# Altium PCB MC_SunSensorPCB.PcbDoc (part 1 of 2)
Units mm, origin at the board's own origin, x right, y up, seen from the top; angles counter-clockwise.
Board outline 90.17 x 95.88 mm, 4 copper layers (F.Cu, In1.Cu, In2.Cu, B.Cu); 111 components, 182 nets, 555 pads, 174 vias.
Unrouted connection lines stored in the file: 3.
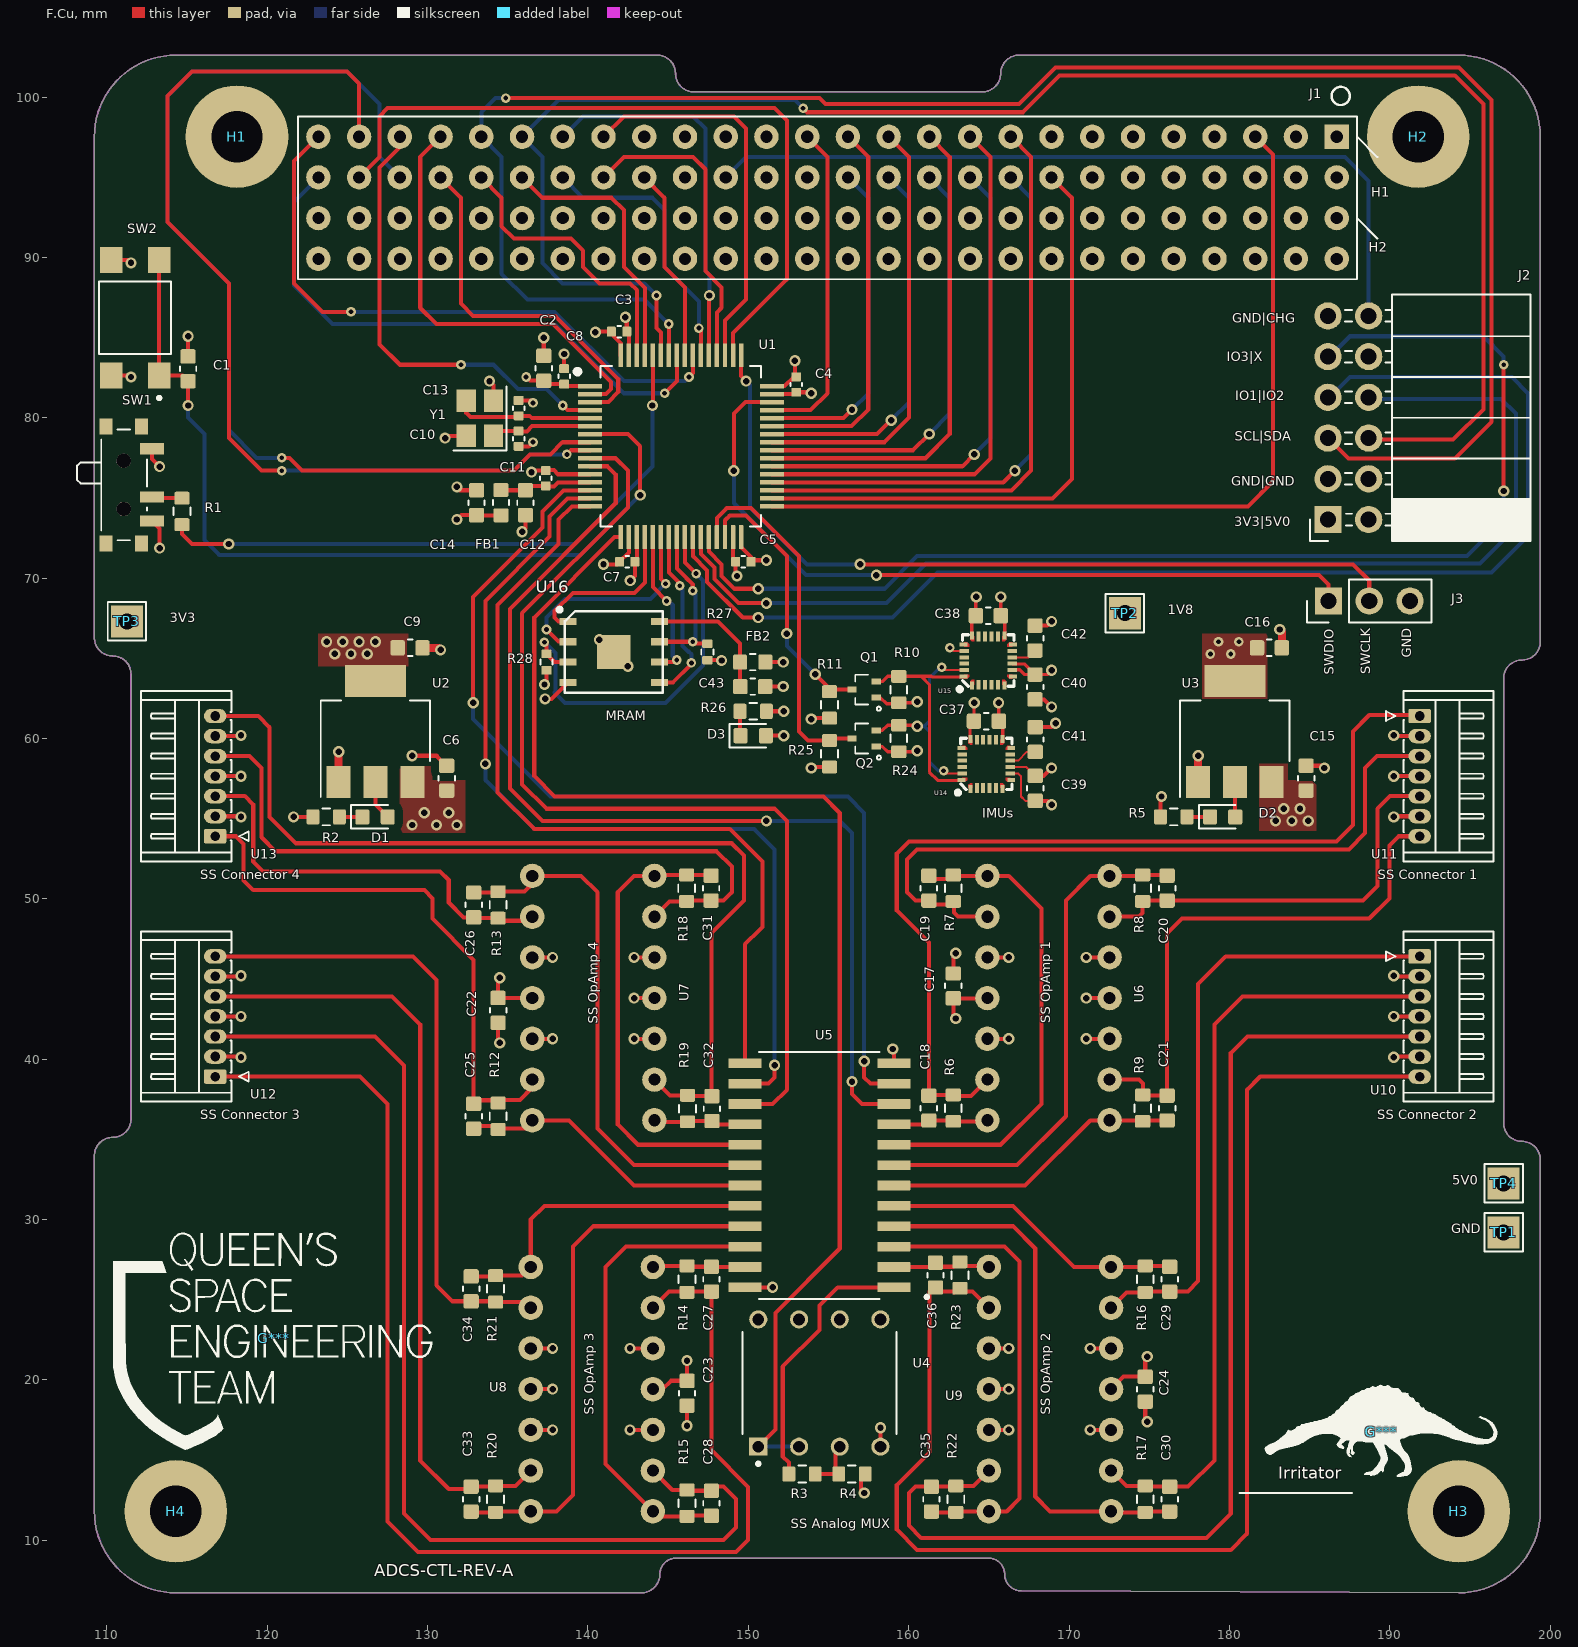
[diagram p0: F.Cu view]
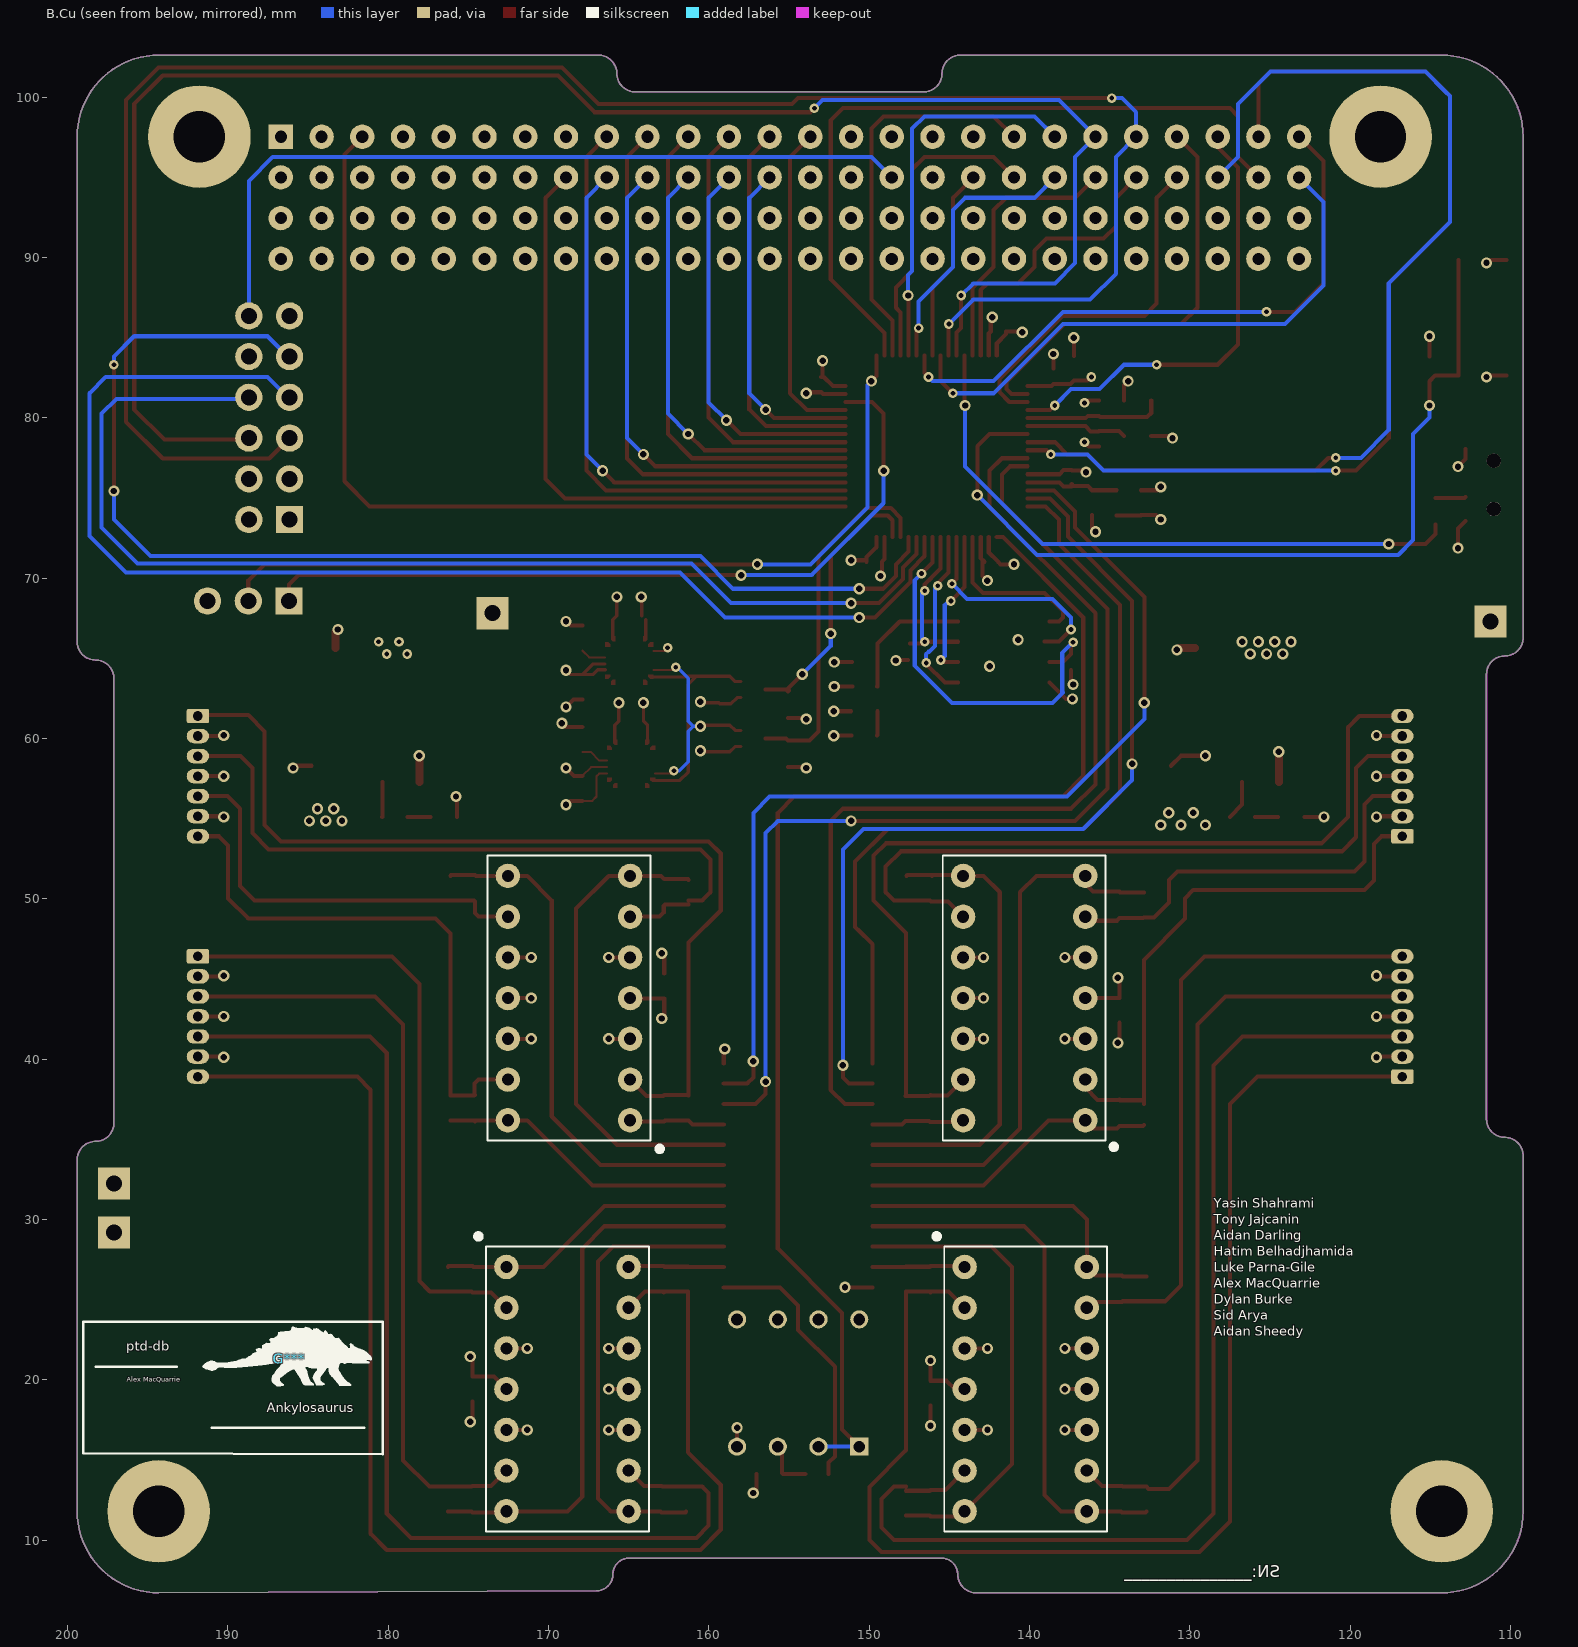
[diagram p1: B.Cu view, seen from below]
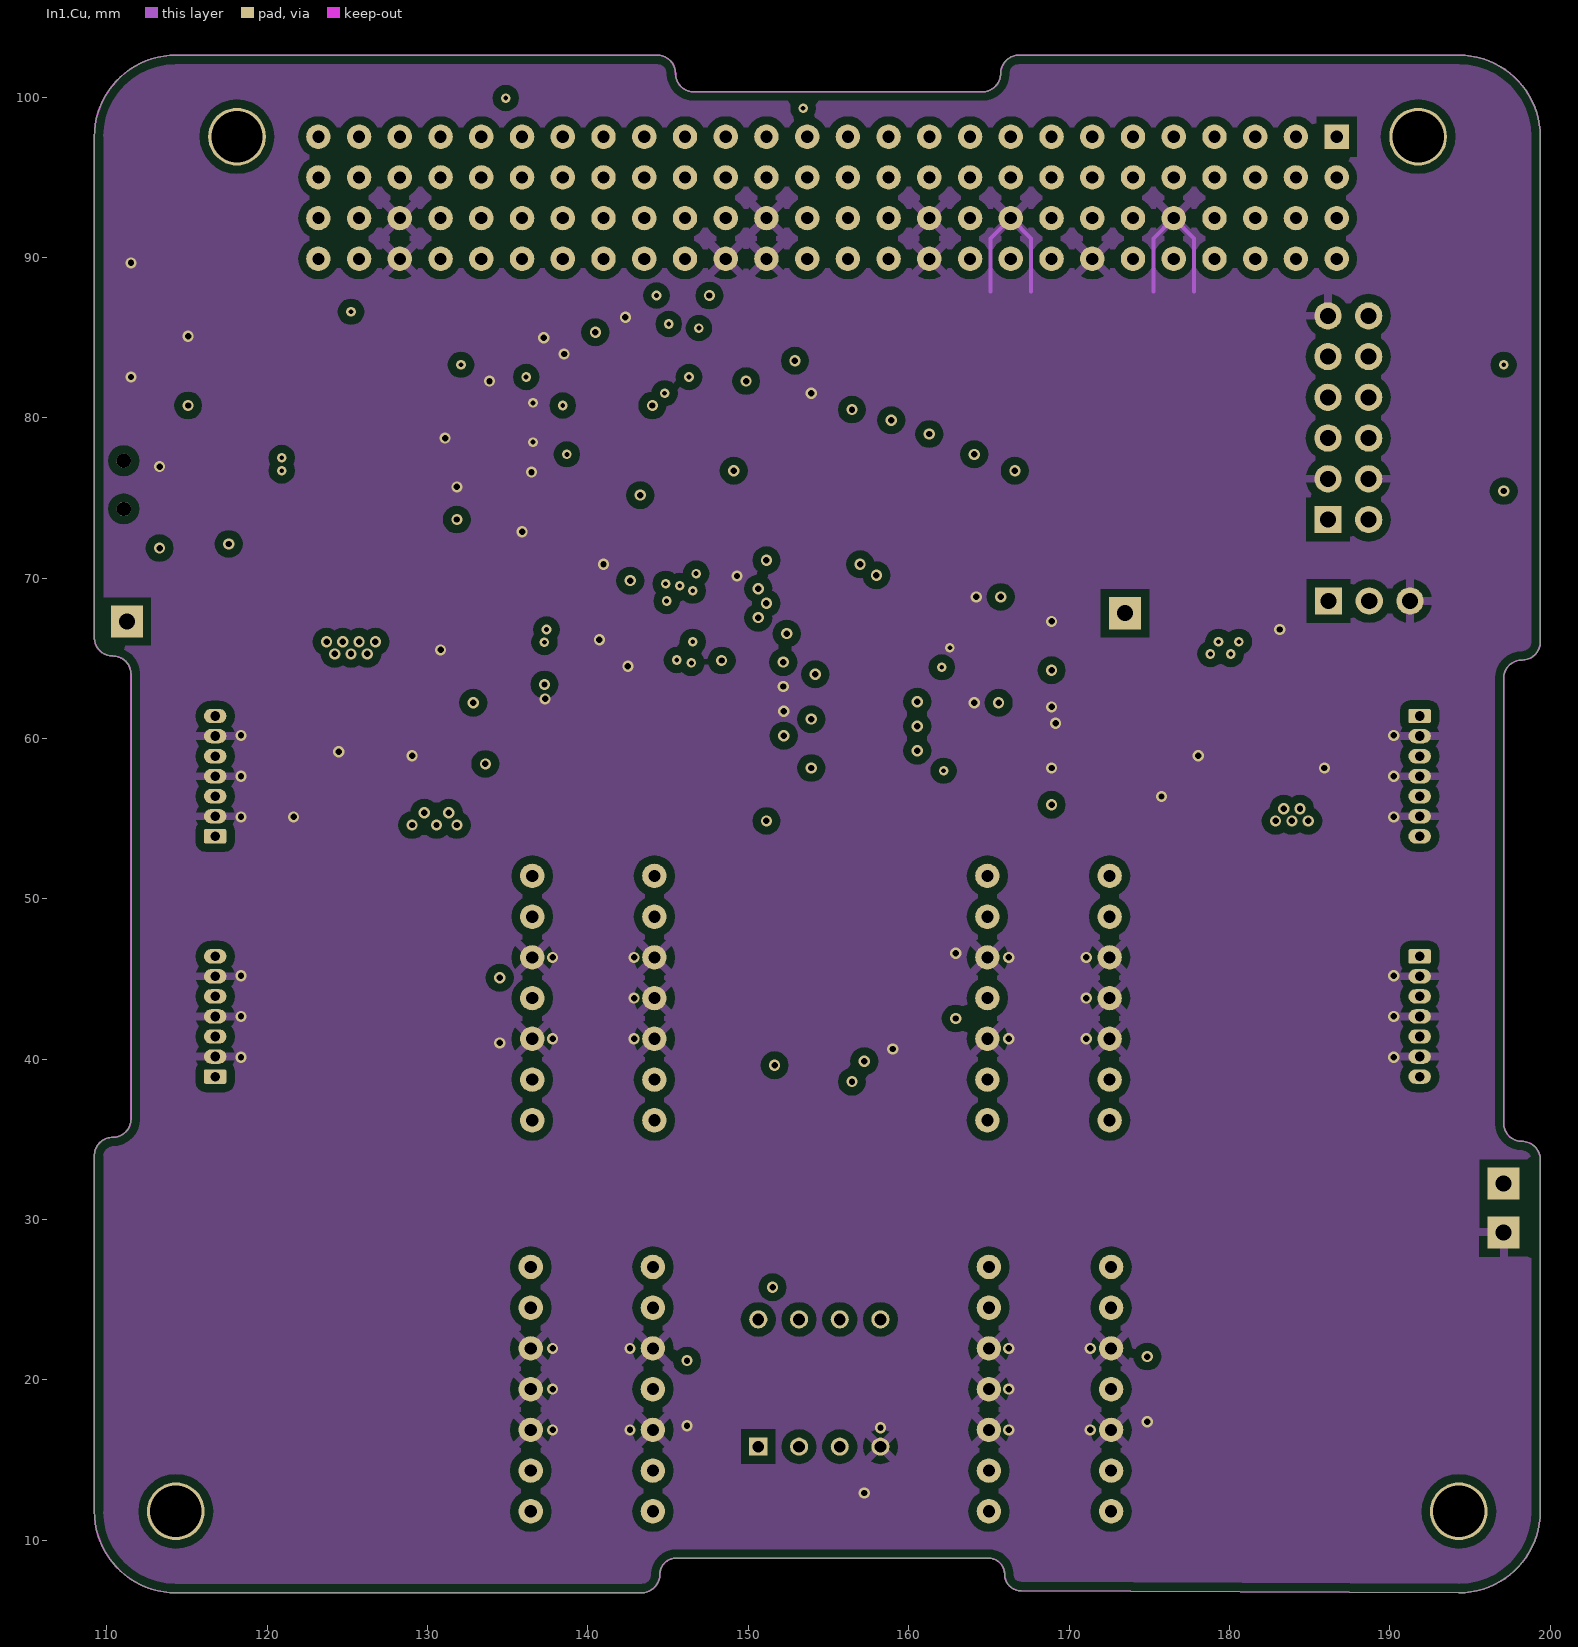
[diagram p2: In1.Cu]
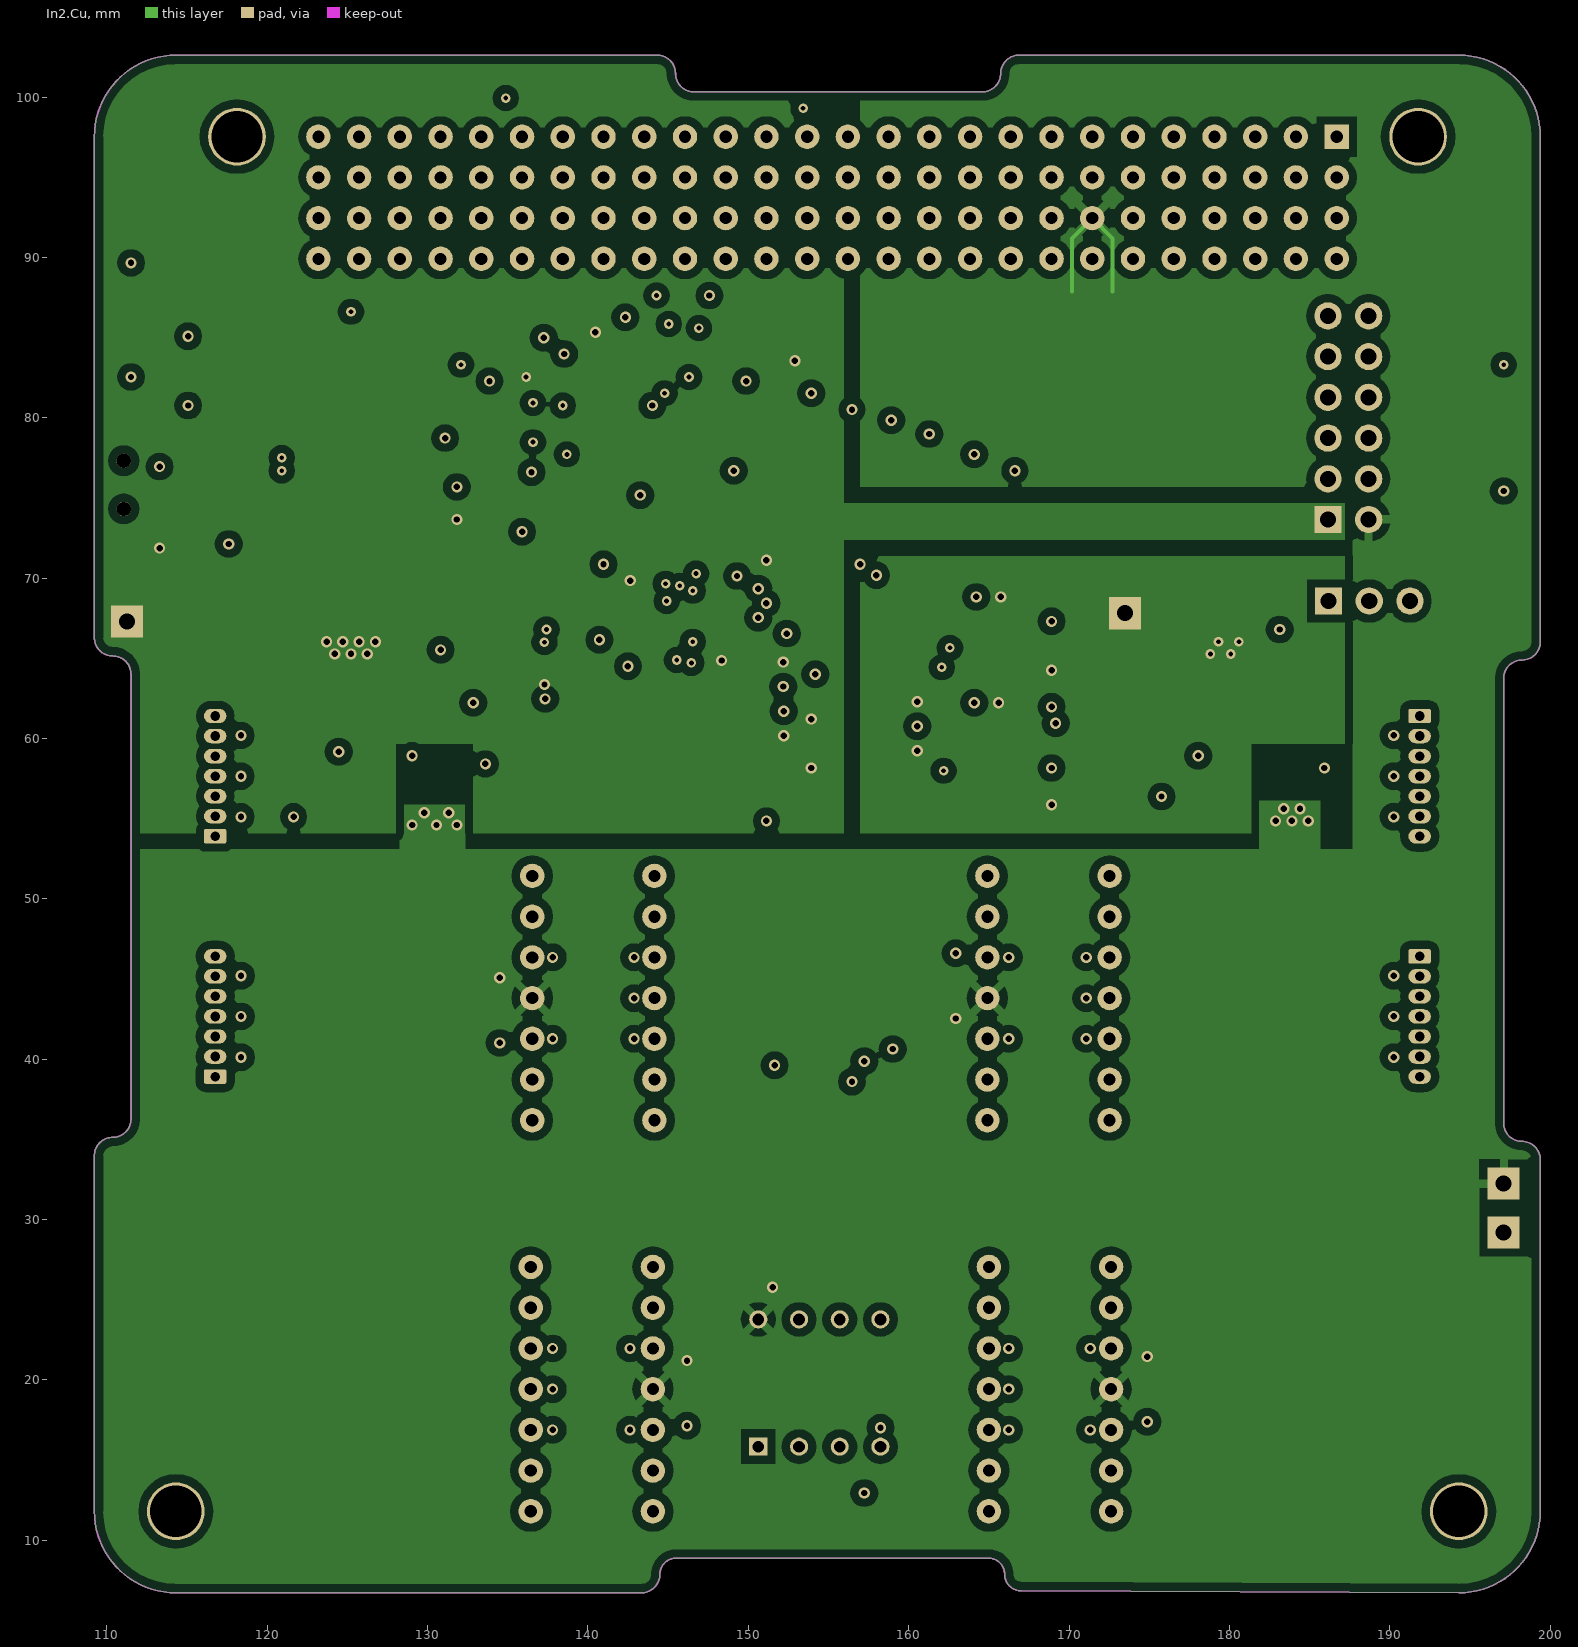
[diagram p3: In2.Cu]

## Layer stack, top to bottom
F.Mask: solder mask 0.0102, Solder Resist, Dk 3.5
F.Cu: signal copper 0.0356
Dielectric 1: dielectric 0.32, FR-4, Dk 4.8
In1.Cu: signal copper 0.0356
Dielectric2: dielectric 0.32, FR-4, Dk 4.8
In2.Cu: signal copper 0.0356
Dielectric3: dielectric 0.32, FR-4, Dk 4.8
B.Cu: signal copper 0.0356
B.Mask: solder mask 0.0102, Solder Resist, Dk 3.5

## Board outline
109.22,66.287 ccw(c110.363,66.287) 110.363,65.144 cw(c110.363,64.001) 111.506,36.269 cw(c110.363,36.269) 110.363,35.126 ccw(c110.363,33.983) 109.22,11.804 ccw(c114.3,11.804) 114.3,6.724 143.337,6.724 ccw(c143.337,7.867) 144.48,7.867 cw(c145.498,7.864) 145.498,8.883 164.973,8.883 cw(c164.973,7.867) 165.989,7.867 ccw(c167.005,7.867) 167.005,6.851 194.31,6.724 ccw(c194.31,11.804) 199.39,11.804 199.39,33.729 ccw(c198.247,33.729) 198.247,34.872 cw(c198.247,36.015) 197.104,36.015 197.104,63.747 cw(c198.247,63.747) 198.247,64.89 ccw(c198.247,66.033) 199.39,66.033 199.39,97.529 ccw(c194.31,97.529) 194.31,102.609 166.878,102.609 ccw(c166.878,101.466) 165.735,101.466 cw(c164.592,101.466) 164.592,100.323 146.604,100.323 cw(c146.604,101.466) 145.461,101.466 ccw(c144.318,101.466) 144.318,102.609 114.3,102.609 ccw(c114.3,97.529) 109.22,66.287

## Design rules (kind name [scope] priority, off if disabled: settings)
Clearance "Clearence 0.508_Polygon" [InNamedPolygon('F.Cu-1.8V') OR InNamedPolygon('F.Cu-+5V') OR InNamedPolygon('F.Cu-+3V3') OR InNamedPolygon('F.Cu-+5V-1') OR InNamedPolygon('In1.Cu-GND') OR InNamedPolygon('In2.Cu-+5V') OR InNamedPolygon('In2.Cu-1.8V') OR InNamedPolygon('In2.Cu-+3V3')] p1: gap=0.508 ignorepadtopadclearanceinfootprint=FALSE
MinimumSolderMaskSliver [All] p1: minsoldermaskwidth=0
PolygonConnect Polygon_In2.Cu-+3V3_ConnectDirect [IsNamedPolygon('In2.Cu-+3V3')] p1: connectstyle=Direct reliefconductorwidth=0.254 reliefentries=4 polygonreliefangle="90 Angle" airgapwidth=0.254
PolygonConnect Polygon_In2.Cu-1.8V_ConnectDirect [IsNamedPolygon('In2.Cu-1.8V')] p2: connectstyle=Direct reliefconductorwidth=0.254 reliefentries=4 polygonreliefangle="90 Angle" airgapwidth=0.254
PolygonConnect Polygon_In2.Cu-+5V_ConnectDirect [IsNamedPolygon('In2.Cu-+5V') vs IsVia] p3: connectstyle=Direct reliefconductorwidth=0.254 reliefentries=4 polygonreliefangle="90 Angle" airgapwidth=0.254
PolygonConnect Polygon_In2.Cu-+5V_ConnectRelief45 [IsNamedPolygon('In2.Cu-+5V') vs (IsThruPin or IsSMTPin) and (PadShape_AllLayers = 'Round')] p4: connectstyle=Relief reliefconductorwidth=0.508 reliefentries=4 polygonreliefangle="45 Angle" airgapwidth=0.508
PolygonConnect Polygon_In2.Cu-+5V_ConnectRelief90 [IsNamedPolygon('In2.Cu-+5V') vs (IsThruPin or IsSMTPin) and (PadShape_AllLayers <> 'Round')] p5: connectstyle=Relief reliefconductorwidth=0.508 reliefentries=4 polygonreliefangle="90 Angle" airgapwidth=0.508
PolygonConnect Polygon_In1.Cu-GND_ConnectDirect [IsNamedPolygon('In1.Cu-GND') vs IsVia] p6: connectstyle=Direct reliefconductorwidth=0.254 reliefentries=4 polygonreliefangle="90 Angle" airgapwidth=0.254
PolygonConnect Polygon_In1.Cu-GND_ConnectRelief45 [IsNamedPolygon('In1.Cu-GND') vs (IsThruPin or IsSMTPin) and (PadShape_AllLayers = 'Round')] p7: connectstyle=Relief reliefconductorwidth=0.508 reliefentries=4 polygonreliefangle="45 Angle" airgapwidth=0.508
PolygonConnect Polygon_In1.Cu-GND_ConnectRelief90 [IsNamedPolygon('In1.Cu-GND') vs (IsThruPin or IsSMTPin) and (PadShape_AllLayers <> 'Round')] p8: connectstyle=Relief reliefconductorwidth=0.508 reliefentries=4 polygonreliefangle="90 Angle" airgapwidth=0.508
PolygonConnect Polygon_F.Cu-+5V-1_ConnectDirect [IsNamedPolygon('F.Cu-+5V-1')] p9: connectstyle=Direct reliefconductorwidth=0.254 reliefentries=4 polygonreliefangle="90 Angle" airgapwidth=0.254
PolygonConnect Polygon_F.Cu-+3V3_ConnectDirect [IsNamedPolygon('F.Cu-+3V3')] p10: connectstyle=Direct reliefconductorwidth=0.254 reliefentries=4 polygonreliefangle="90 Angle" airgapwidth=0.254
PolygonConnect Polygon_F.Cu-+5V_ConnectDirect [IsNamedPolygon('F.Cu-+5V')] p11: connectstyle=Direct reliefconductorwidth=0.254 reliefentries=4 polygonreliefangle="90 Angle" airgapwidth=0.254
PolygonConnect Polygon_F.Cu-1.8V_ConnectDirect [IsNamedPolygon('F.Cu-1.8V')] p12: connectstyle=Direct reliefconductorwidth=0.254 reliefentries=4 polygonreliefangle="90 Angle" airgapwidth=0.254
RoutingVias [All] p1: holewidth=0.711 width=1.27 viastyle="Through Hole" minholewidth=0.711 minwidth=1.27 maxholewidth=0.711 maxwidth=1.27
SilkToSilkClearance [All] p1: silktosilkclearance=0
SilkToSolderMaskClearance [IsPad] p1: minsilkscreentomaskgap=0 clearancetoexposedcopper=TRUE
SolderMaskExpansion [All] p1: expansion=0.102 istentingtop=FALSE
Width [All] p1: maxlimit=10 minlimit=0.254 preferedwidth=0.254 minimp=50.000000 maximp=50.000000 favimp=50.000000
27 further rules are at their usual default settings.

## Components (designator, comment, footprint, x,y, rotation, side; value= is the part's Value field where it differs from the comment)
C1 "100nF" C_0603_1608Metric 115.062,83.051 r90 top
C2 "10uF" C_0603_1608Metric 137.242,83.087 r90 top
C3 "100nF" C_0402_1005Metric 141.941,85.373 r0 top
C4 "100nF" C_0402_1005Metric 152.99,82.071 r270 top
C5 "100nF" C_0402_1005Metric 149.688,71.022 r180 top
C6 "10uF" C_0603_1608Metric 131.191,57.524 r90 top
C7 "100nF" C_0402_1005Metric 142.449,71.022 r180 top
C8 "100nF" C_0402_1005Metric 138.512,82.579 r90 top
C9 "10uF" C_0603_1608Metric 128.905,65.652 r180 top
C10 "4pF" C_0402_1005Metric 135.675,78.696 r270 top
C11 "10nF" C_0402_1005Metric 137.369,76.229 r90 top
C12 "1uF" C_0603_1608Metric 136.099,74.705 r270 top
C13 "4pF" C_0402_1005Metric 135.675,80.601 r90 top
C14 "1uF" C_0603_1608Metric 133.051,74.705 r90 top
C15 "1.0uF" C_0603_1608Metric 184.785,57.524 r90 top
C16 "10uF" C_0603_1608Metric 182.499,65.652 r0 top
C17 "100nF" C_0603_1608Metric 162.783,44.57 r90 top
C18 "180pF" C_0603_1608Metric 161.259,36.95 r90 top
C19 "180pF" C_0603_1608Metric 161.259,50.666 r270 top
C20 "180pF" C_0603_1608Metric 176.118,50.666 r270 top
C21 "180pF" C_0603_1608Metric 176.118,36.95 r270 top
C22 "100nF" C_0603_1608Metric 134.398,43.046 r270 top
C23 "100nF" C_0603_1608Metric 146.177,19.17 r270 top
C24 "100nF" C_0603_1608Metric 174.752,19.424 r270 top
C25 "180pF" C_0603_1608Metric 132.874,36.442 r90 top
C26 "180pF" C_0603_1608Metric 132.874,49.619 r270 top
C27 "180pF" C_0603_1608Metric 147.701,26.282 r270 top
C28 "180pF" C_0603_1608Metric 147.701,12.312 r90 top
C29 "180pF" C_0603_1608Metric 176.276,26.282 r270 top
C30 "180pF" C_0603_1608Metric 176.276,12.566 r90 top
C31 "180pF" C_0603_1608Metric 147.676,50.666 r270 top
C32 "180pF" C_0603_1608Metric 147.733,36.919 r270 top
C33 "180pF" C_0603_1608Metric 132.715,12.566 r90 top
C34 "180pF" C_0603_1608Metric 132.715,25.678 r90 top
C35 "180pF" C_0603_1608Metric 161.417,12.566 r90 top
C36 "180pF" C_0603_1608Metric 161.671,26.536 r90 top
C37 "1.0uF" C_0603_1608Metric 164.846,61.08 r180 top
C38 "1.0uF" C_0603_1608Metric 164.964,67.656 r180 top
C39 "0.1uF" C_0603_1608Metric 167.894,56.889 r90 top
C40 "0.1uF" C_0603_1608Metric 167.885,63.211 r270 top
C41 "0.1uF" C_0603_1608Metric 167.894,59.937 r90 top
C42 "0.1uF" C_0603_1608Metric 167.885,66.259 r90 top
C43 "100nF" C_0603_1608Metric 150.273,63.239 r0 top
D1 "GREEN" LED_0603_1608Metric 126.721,55.111 r0 top
D2 "GREEN" LED_0603_1608Metric 179.578,55.111 r0 top
D3 "GREEN" LED_0603_1608Metric 150.304,60.172 r0 top
FB1 "FerriteBead" L_0603_1608Metric 134.575,74.705 r270 top
FB2 "100R @ 100 MHz" L_0603_1608Metric 150.273,64.763 r180 top
G*** "LOGO" LOGO 186.182,21.329 r0 bottom
G*** "LOGO" LOGO 189.484,16.757 r0 top
G*** "LOGO" LOGO 120.396,22.599 r0 top
H1 "MountingHole_Pad" MountingHole_3.2mm_M3_Pad_TopBottom 118.11,97.529 r0 top
H2 "MountingHole_Pad" MountingHole_3.2mm_M3_Pad_TopBottom 191.77,97.529 r0 top
H3 "MountingHole_Pad" MountingHole_3.2mm_M3_Pad_TopBottom 194.31,11.804 r0 top
H4 "MountingHole_Pad" MountingHole_3.2mm_M3_Pad_TopBottom 114.3,11.804 r0 top
J1 "PC104_Connector" pc104-connector 156.21,94.989 r270 top
J2 "Conn_02x06_Odd_Even" PinSocket_2x06_P2.54mm_Horizontal 186.145,73.653 r180 top
J3 "Conn_01x03_Female" PinHeader_1x03_P2.54mm_Vertical 186.182,68.573 r90 top
Q1 "RE1C002UNTCL" RE1C002UNTCL 157.226,63.049 r90 top
Q2 "RE1C002UNTCL" RE1C002UNTCL 157.226,60.001 r90 top
R1 "10k" R_0603_1608Metric 114.681,74.161 r270 top
R2 "2k2" R_0603_1608Metric 123.673,55.111 r0 top
R3 "1Meg" R_0603_1608Metric 153.353,14.132 r0 top
R4 "2Meg" R_0603_1608Metric 156.464,14.132 r0 top
R5 "1k" R_0603_1608Metric 176.53,55.111 r0 top
R6 "5.76k" R_0603_1608Metric 162.783,36.95 r90 top
R7 "5.76k" R_0603_1608Metric 162.783,50.666 r90 top
R8 "5.76k" R_0603_1608Metric 174.594,50.666 r270 top
R9 "5.76k" R_0603_1608Metric 174.594,36.95 r270 top
R10 "2.2k" R_0603_1608Metric 159.385,63.049 r270 top
R11 "2.2k" R_0603_1608Metric 155.067,62.096 r270 top
R12 "5.76k" R_0603_1608Metric 134.398,36.442 r90 top
R13 "5.76k" R_0603_1608Metric 134.398,49.619 r90 top
R14 "5.76k" R_0603_1608Metric 146.177,26.282 r270 top
R15 "5.76k" R_0603_1608Metric 146.177,12.312 r270 top
R16 "5.76k" R_0603_1608Metric 174.752,26.282 r270 top
R17 "5.76k" R_0603_1608Metric 174.752,12.566 r270 top
R18 "5.76k" R_0603_1608Metric 146.152,50.666 r270 top
R19 "5.76k" R_0603_1608Metric 146.209,36.919 r270 top
R20 "5.76k" R_0603_1608Metric 134.239,12.566 r90 top
R21 "5.76k" R_0603_1608Metric 134.239,25.678 r90 top
R22 "5.76k" R_0603_1608Metric 162.941,12.566 r90 top
R23 "5.76k" R_0603_1608Metric 163.195,26.536 r90 top
R24 "2.2k" R_0603_1608Metric 159.385,60.001 r270 top
R25 "2.2k" R_0603_1608Metric 155.067,59.048 r270 top
R26 "2k2" R_0603_1608Metric 150.304,61.696 r0 top
R27 "10k" R_0402_1005Metric 147.447,65.398 r90 top
R28 "10k" R_0402_1005Metric 137.414,64.763 r270 top
SW1 "SW_SPDT" SW_SPDT_PCM12 111.379,75.812 r270 top
SW2 "TL3305CF260QG" SW_TL3305CF260QG 111.76,86.234 r90 top
TP1 "GND" TestPoint_THTPad_2.0x2.0mm_Drill1.0mm 197.104,29.203 r0 top
TP2 "1V8" TestPoint_THTPad_2.0x2.0mm_Drill1.0mm 173.482,67.811 r0 top
TP3 "3V3" TestPoint_THTPad_2.0x2.0mm_Drill1.0mm 111.252,67.303 r0 top
TP4 "5V0" TestPoint_THTPad_2.0x2.0mm_Drill1.0mm 197.104,32.251 r0 top
U1 "STM32F103RET6" QFP50P1200X1200X160-64N 145.796,78.225 r0 top
U2 "AMS1117-3.3" SOT-223-3_TabPin2 126.746,60.445 r90 top
U3 "AMS1117-1.8" SOT-223-3_TabPin2 180.34,60.445 r90 top
U4 "LM358N" DIP794W45P254L959H508Q8 154.432,19.805 r90 top
U5 "CD74HC4067M96" SOIC127P1030X265-24N 154.432,32.759 r180 top
U6 "LM324N" Op-Amp 162.37,45.078 r90 top
U7 "LM324N" Op-Amp 133.985,45.078 r90 top
U8 "LM324N" Op-Amp 146.59,18.154 r270 top
U9 "LM324N" Op-Amp 175.165,18.154 r270 top
U10 "DF13-7P-1.25DS(20)" Hirose_DF13-07P-1.25DS_1x07_P1.25mm_Horizontal 191.862,46.415 r270 top
U11 "DF13-7P-1.25DS(20)" Hirose_DF13-07P-1.25DS_1x07_P1.25mm_Horizontal 191.862,61.401 r270 top
U12 "DF13-7P-1.25DS(20)" Hirose_DF13-07P-1.25DS_1x07_P1.25mm_Horizontal 116.748,38.915 r90 top
U13 "DF13-7P-1.25DS(20)" Hirose_DF13-07P-1.25DS_1x07_P1.25mm_Horizontal 116.748,53.901 r90 top
U14 "9DoF IMU" QFN24-3X3 164.846,58.413 r90 top
U15 "9DoF IMU" QFN24-3X3 164.964,64.862 r90 top
U16 "MR25H10MDF" SON127P600X500X90-9N-D 141.605,65.398 r0 top
Y1 "Crystal_GND24" Crystal_SMD_3225-4Pin_3.2x2.5mm 133.262,79.966 r90 top

## Footprints (in the part's own frame and the unit in brackets; to place one, negate y for a bottom-side part, rotate by r counter-clockwise, add the part's x,y. Pads: shape width x height; smd on the part's side, far side on the other; paste and mask are expansions set on the pad)
C_0402_1005Metric [mm]
  rrect25% 0.56x0.62 smd mask+0: 1(-0.48,0) 2(0.48,0)
  silkscreen extent -0.11,-0.36 0.11,0.36
C_0603_1608Metric [mm]
  rrect25% 0.9x0.95 smd mask+0: 1(-0.775,0) 2(0.775,0)
  silkscreen extent -0.14,-0.51 0.14,0.51
Crystal_SMD_3225-4Pin_3.2x2.5mm [mm]
  rect 1.4x1.2 smd mask+0: 1(-1.1,-0.85) 2(1.1,-0.85) 3(1.1,0.85) 4(-1.1,0.85)
  silkscreen extent -2,-1.65 2,1.65
DIP794W45P254L959H508Q8 [mm]
  rect 1.13x1.13 hole 0.74 paste-2539.97 mask+0: 1(-3.97,3.81)
  round 1.13 hole 0.74 paste-2539.97 mask+0: 2(-3.97,1.27) 3(-3.97,-1.27) 4(-3.97,-3.81) 5(3.97,-3.81) 6(3.97,-1.27) 7(3.97,1.27) 8(3.97,3.81)
  silkscreen extent -5.13,-4.79 3.18,4.79
Hirose_DF13-07P-1.25DS_1x07_P1.25mm_Horizontal [mm]
  rrect25% 0.9x1.4 hole 0.6 paste-2539.97 mask+0: 1(0,0)
  rrect100% 0.9x1.4 hole 0.6 paste-2539.97 mask+0: 2(1.25,0) 3(2.5,0) 4(3.75,0) 5(5,0) 6(6.25,0) 7(7.5,0)
  silkscreen extent -1.56,-2.1 9.06,4.61
L_0603_1608Metric [mm]
  rrect25% 0.875x0.95 smd mask+0: 1(-0.787,0) 2(0.787,0)
  silkscreen extent -0.16,-0.51 0.16,0.51
LED_0603_1608Metric [mm]
  rrect25% 0.875x0.95 smd mask+0: 1(-0.787,0) 2(0.787,0)
  silkscreen extent -1.49,-0.73 0.8,0.73
LOGO [mm]
  silkscreen extent -5.16,-1.98 5.4,1.72
MountingHole_3.2mm_M3_Pad_TopBottom [mm]
  round 6.4 smd paste-6.4 mask+0: 1(0,0)
  round 3.6 hole 3.2 paste-2539.97 mask+0: 1(0,0)
  round 6.4 smd far side paste-6.4 mask+0: 1(0,0)
Op-Amp [mil]
  round 60 hole 30 paste-99999 mask+0: 1(-350,-100) 2(-250,-100) 3(-150,-100) 4(-50,-100) 5(50,-100) 6(150,-100) 7(250,-100) 8(-350,-400) 9(-250,-400) 10(-150,-400) 11(-50,-400) 12(50,-400) 13(150,-400) 14(250,-400)
pc104-connector [mil]
  rect 60x60 hole 30 paste-99999 mask+0: 1(-100,1200)
  round 60 hole 30 paste-99999 mask+0: 2(0,1200) 3(-100,1100) 4(0,1100) 5(-100,1000) 6(0,1000) 7(-100,900) 8(0,900) 9(-100,800) 10(0,800) 11(-100,700) 12(0,700) 13(-100,600) 14(0,600) 15(-100,500) 16(0,500) 17(-100,400) 18(0,400) 19(-100,300) 20(0,300) 21(-100,200) 22(0,200) 23(-100,100) 24(0,100) 25(-100,0) 26(0,0) 27(-100,-100) 28(0,-100) 29(-100,-200) 30(0,-200) 31(-100,-300) 32(0,-300) 33(-100,-400) 34(0,-400) 35(-100,-500) 36(0,-500) 37(-100,-600) 38(0,-600) 39(-100,-700) 40(0,-700) 41(-100,-800) 42(0,-800) 43(-100,-900) 44(0,-900) 45(-100,-1000) 46(0,-1000) 47(-100,-1100) 48(0,-1100) 49(-100,-1200) 50(0,-1200) 51(-100,-1300) 52(0,-1300) 53(100,1200) 54(200,1200) 55(100,1100) 56(200,1100) 57(100,1000) 58(200,1000) 59(100,900) 60(200,900) 61(100,800) 62(200,800) 63(100,700) 64(200,700) 65(100,600) 66(200,600) 67(100,500) 68(200,500) 69(100,400) 70(200,400) 71(100,300) 72(200,300) 73(100,200) 74(200,200) 75(100,100) 76(200,100) 77(100,0) 78(200,0) 79(100,-100) 80(200,-100) 81(100,-200) 82(200,-200) 83(100,-300) 84(200,-300) 85(100,-400) 86(200,-400) 87(100,-500) 88(200,-500) 89(100,-600) 90(200,-600) 91(100,-700) 92(200,-700) 93(100,-800) 94(200,-800) 95(100,-900) 96(200,-900) 97(100,-1000) 98(200,-1000) 99(100,-1100) 100(200,-1100) 101(100,-1200) 102(200,-1200) 103(100,-1300) 104(200,-1300)
  silkscreen extent -150,-1350 250,1300
PinHeader_1x03_P2.54mm_Vertical [mm]
  rect 1.7x1.7 hole 1 paste-2539.97 mask+0: 1(0,0)
  rrect100% 1.7x1.7 hole 1 paste-2539.97 mask+0: 2(0,-2.54) 3(0,-5.08)
  silkscreen extent -1.33,-6.41 1.33,1.33
PinSocket_2x06_P2.54mm_Horizontal [mm]
  rect 1.7x1.7 hole 1 paste-2539.97 mask+0: 1(0,0)
  rrect100% 1.7x1.7 hole 1 paste-2539.97 mask+0: 2(-2.54,0) 3(0,-2.54) 4(-2.54,-2.54) 5(0,-5.08) 6(-2.54,-5.08) 7(0,-7.62) 8(-2.54,-7.62) 9(0,-10.16) 10(-2.54,-10.16) 11(0,-12.7) 12(-2.54,-12.7)
  silkscreen extent -12.63,-14.03 1.11,1.33
QFN24-3X3 [mm]
  rect 0.495x0.25 smd paste-0.495 mask+0.102: 1(-1.552,1) 6(-1.552,-1) 13(1.552,-1) 18(1.552,1)
  rect 0.6x0.25 smd paste-0.6 mask+0.102: 2(-1.5,0.6) 3(-1.5,0.2) 4(-1.5,-0.2) 5(-1.5,-0.6) 14(1.5,-0.6) 15(1.5,-0.2) 16(1.5,0.2) 17(1.5,0.6)
  rect 0.25x0.495 smd paste-0.495 mask+0.102: 7(-1,-1.552) 12(1,-1.552) 19(1,1.552) 24(-1,1.552)
  rect 0.25x0.6 smd paste-0.6 mask+0.102: 8(-0.6,-1.5) 9(-0.2,-1.5) 10(0.2,-1.5) 11(0.6,-1.5) 20(0.6,1.5) 21(0.2,1.5) 22(-0.2,1.5) 23(-0.6,1.5)
  F.Cu region: 1.126,1.304 1.021,1.199 0.874,1.199 0.874,1.501 1.126,1.501
  F.Cu region: 1.126,-1.304 1.126,-1.501 0.874,-1.501 0.874,-1.199 1.021,-1.199
  F.Cu region: -1.199,-1.021 -1.304,-1.126 -1.501,-1.126 -1.501,-0.874 -1.199,-0.874
  F.Cu region: 1.501,0.874 1.199,0.874 1.199,1.021 1.304,1.126 1.501,1.126
  F.Cu region: -0.874,1.199 -1.021,1.199 -1.126,1.304 -1.126,1.501 -0.874,1.501
  F.Cu region: 1.501,-1.126 1.304,-1.126 1.199,-1.021 1.199,-0.874 1.501,-0.874
  F.Cu region: -1.199,1.021 -1.199,0.874 -1.501,0.874 -1.501,1.126 -1.304,1.126
  F.Cu region: -0.874,-1.501 -1.126,-1.501 -1.126,-1.304 -1.021,-1.199 -0.874,-1.199
  silkscreen extent -1.93,-1.6 1.6,1.92
QFP50P1200X1200X160-64N [mm]
  rrect7% 1.49x0.28 smd mask+0: 1(-5.67,3.75) 2(-5.67,3.25) 3(-5.67,2.75) 4(-5.67,2.25) 5(-5.67,1.75) 6(-5.67,1.25) 7(-5.67,0.75) 8(-5.67,0.25) 9(-5.67,-0.25) 10(-5.67,-0.75) 11(-5.67,-1.25) 12(-5.67,-1.75) 13(-5.67,-2.25) 14(-5.67,-2.75) 15(-5.67,-3.25) 16(-5.67,-3.75) 33(5.67,-3.75) 34(5.67,-3.25) 35(5.67,-2.75) 36(5.67,-2.25) 37(5.67,-1.75) 38(5.67,-1.25) 39(5.67,-0.75) 40(5.67,-0.25) 41(5.67,0.25) 42(5.67,0.75) 43(5.67,1.25) 44(5.67,1.75) 45(5.67,2.25) 46(5.67,2.75) 47(5.67,3.25) 48(5.67,3.75)
  rrect7% 0.28x1.49 smd mask+0: 17(-3.75,-5.67) 18(-3.25,-5.67) 19(-2.75,-5.67) 20(-2.25,-5.67) 21(-1.75,-5.67) 22(-1.25,-5.67) 23(-0.75,-5.67) 24(-0.25,-5.67) 25(0.25,-5.67) 26(0.75,-5.67) 27(1.25,-5.67) 28(1.75,-5.67) 29(2.25,-5.67) 30(2.75,-5.67) 31(3.25,-5.67) 32(3.75,-5.67) 49(3.75,5.67) 50(3.25,5.67) 51(2.75,5.67) 52(2.25,5.67) 53(1.75,5.67) 54(1.25,5.67) 55(0.75,5.67) 56(0.25,5.67) 57(-0.25,5.67) 58(-0.75,5.67) 59(-1.25,5.67) 60(-1.75,5.67) 61(-2.25,5.67) 62(-2.75,5.67) 63(-3.25,5.67) 64(-3.75,5.67)
  silkscreen extent -6.6,-5 5,5
R_0402_1005Metric [mm]
  rrect25% 0.54x0.64 smd mask+0: 1(-0.51,0) 2(0.51,0)
  silkscreen extent -0.15,-0.38 0.15,0.38
R_0603_1608Metric [mm]
  rrect25% 0.8x0.95 smd mask+0: 1(-0.825,0) 2(0.825,0)
  silkscreen extent -0.24,-0.52 0.24,0.52
RE1C002UNTCL [mil]
  rect 14x23 smd mask+0: 1(-19.68,-30) 2(19.68,-30) 3(0,30)
  silkscreen extent -52,-41 36,22
SOIC127P1030X265-24N [mm]
  rrect7% 2.06x0.6 smd mask+0: 1(-4.64,6.985) 2(-4.64,5.715) 3(-4.64,4.445) 4(-4.64,3.175) 5(-4.64,1.905) 6(-4.64,0.635) 7(-4.64,-0.635) 8(-4.64,-1.905) 9(-4.64,-3.175) 10(-4.64,-4.445) 11(-4.64,-5.715) 12(-4.64,-6.985) 13(4.64,-6.985) 14(4.64,-5.715) 15(4.64,-4.445) 16(4.64,-3.175) 17(4.64,-1.905) 18(4.64,-0.635) 19(4.64,0.635) 20(4.64,1.905) 21(4.64,3.175) 22(4.64,4.445) 23(4.64,5.715) 24(4.64,6.985)
  silkscreen extent -6.8,-7.7 3.75,7.7
SON127P600X500X90-9N-D [mm]
  rect 1.05x0.45 smd mask+0: 1(-2.85,1.905) 2(-2.85,0.635) 3(-2.85,-0.635) 4(-2.85,-1.905) 5(2.85,-1.905) 6(2.85,-0.635) 7(2.85,0.635) 8(2.85,1.905)
  rect 2.1x2.1 smd mask+0: 9(0,0)
  silkscreen extent -3.5,2.51 -3.25,2.75
SOT-223-3_TabPin2 [mm]
  rect 2x1.5 smd mask+0: 1(-3.15,2.3) 2(-3.15,0) 3(-3.15,-2.3)
  rect 2x3.8 smd mask+0: 2(3.15,0)
  silkscreen extent -4.1,-3.41 1.91,3.41
SW_SPDT_PCM12 [mm]
  rect 0.7x1.5 smd mask+0: 1(-2.25,1.43) 2(0.75,1.43) 3(2.25,1.43)
  round 0.9 hole 0.9 paste-2539.97 mask+0: Un1(1.5,-0.33) Un4(-1.5,-0.33)
  rect 1x0.8 smd mask+0: Un2(3.65,0.78) Un3(-3.65,-1.43) Un5(3.65,-1.43) Un6(-3.65,0.78)
  silkscreen extent -3.45,-3.23 3.45,1.12
SW_TL3305CF260QG [mm]
  rect 1.6x1.4 smd mask+0: 1(-3.6,-1.5) 2(3.6,-1.5) 3(-3.6,1.5) 4(3.6,1.5)
  silkscreen extent -5.1,-2.25 2.25,2.25
TestPoint_THTPad_2.0x2.0mm_Drill1.0mm [mm]
  rect 2x2 hole 1 paste-2539.97 mask+0: 1(0,0)
  silkscreen extent -1.2,-1.2 1.2,1.2

## Part data
C1 C2 C6 C9 C12 C14 C15 C16 C17 C18 C19 C20 C21 C22 C23 C24 C25 C26 C27 C28 C29 C30 C31 C32 C33 C34 C35 C36 C37 C38 C39 C40 C41 C42 C43: library part C_0603_1608Metric, "Capacitor SMD 0603 (1608 Metric), square (rectangular) end terminal, IPC_7351 nominal, (Body size source: IPC-SM-782 page 76, https://www.pcb-3d.com/wordpress/wp-content/uploads/ipc-sm-782a_amendment_1_and_2.pdf), generated with kicad-footprint-generator", Sheetfile=MC_SunSensorPCB.kicad_sch
C3 C4 C5 C7 C8 C10 C11 C13: library part C_0402_1005Metric, "Capacitor SMD 0402 (1005 Metric), square (rectangular) end terminal, IPC_7351 nominal, (Body size source: IPC-SM-782 page 76, https://www.pcb-3d.com/wordpress/wp-content/uploads/ipc-sm-782a_amendment_1_and_2.pdf), generated with kicad-footprint-generator", Sheetfile=MC_SunSensorPCB.kicad_sch
D1 D2 D3: library part LED_0603_1608Metric, "LED SMD 0603 (1608 Metric), square (rectangular) end terminal, IPC_7351 nominal, (Body size source: http://www.tortai-tech.com/upload/download/2011102023233369053.pdf), generated with kicad-footprint-generator", Sheetfile=MC_SunSensorPCB.kicad_sch
FB1 FB2: library part L_0603_1608Metric, "Inductor SMD 0603 (1608 Metric), square (rectangular) end terminal, IPC_7351 nominal, (Body size source: http://www.tortai-tech.com/upload/download/2011102023233369053.pdf), generated with kicad-footprint-generator", Sheetfile=MC_SunSensorPCB.kicad_sch
H1 H2 H3 H4: library part MountingHole_3.2mm_M3_Pad_TopBottom, "Mounting Hole 3.2mm, M3", Sheetfile=MC_SunSensorPCB.kicad_sch
J1: library part pc104-connector, Sheetfile=MC_SunSensorPCB.kicad_sch
J2: library part PinSocket_2x06_P2.54mm_Horizontal, "Through hole angled socket strip, 2x06, 2.54mm pitch, 8.51mm socket length, double cols (from Kicad 4.0.7), script generated", Sheetfile=MC_SunSensorPCB.kicad_sch
J3: library part PinHeader_1x03_P2.54mm_Vertical, "Through hole straight pin header, 1x03, 2.54mm pitch, single row", Sheetfile=MC_SunSensorPCB.kicad_sch
R1 R2 R3 R4 R5 R6 R7 R8 R9 R10 R11 R12 R13 R14 R15 R16 R17 R18 R19 R20 R21 R22 R23 R24 R25 R26: library part R_0603_1608Metric, "Resistor SMD 0603 (1608 Metric), square (rectangular) end terminal, IPC_7351 nominal, (Body size source: IPC-SM-782 page 72, https://www.pcb-3d.com/wordpress/wp-content/uploads/ipc-sm-782a_amendment_1_and_2.pdf), generated with kicad-footprint-generator", Sheetfile=MC_SunSensorPCB.kicad_sch
R27 R28: library part R_0402_1005Metric, "Resistor SMD 0402 (1005 Metric), square (rectangular) end terminal, IPC_7351 nominal, (Body size source: IPC-SM-782 page 72, https://www.pcb-3d.com/wordpress/wp-content/uploads/ipc-sm-782a_amendment_1_and_2.pdf), generated with kicad-footprint-generator", Sheetfile=MC_SunSensorPCB.kicad_sch
SW1: library part SW_SPDT_PCM12, "Ultraminiature Surface Mount Slide Switch, right-angle, https://www.ckswitches.com/media/1424/pcm.pdf", Sheetfile=MC_SunSensorPCB.kicad_sch
SW2: library part SW_TL3305CF260QG, MANUFACTURER=E-Switch, MAXIMUM_PACKAGE_HEIGHT="5 mm", PARTREV=C, SNAPEDA_PN=TL3305BF260QG, STANDARD="Manufacturer Recommendations", Sheetfile=MC_SunSensorPCB.kicad_sch
TP1 TP2 TP3 TP4: library part TestPoint_THTPad_2.0x2.0mm_Drill1.0mm, "THT rectangular pad as test Point, square 2.0mm_Drill1.0mm  side length, hole diameter 1.0mm", Sheetfile=MC_SunSensorPCB.kicad_sch
U1: library part QFP50P1200X1200X160-64N, MANUFACTURER=STMicroelectronics, STANDARD=IPC-7351B, Sheetfile=MC_SunSensorPCB.kicad_sch
U2 U3: library part SOT-223-3_TabPin2, "module CMS SOT223 4 pins", Sheetfile=MC_SunSensorPCB.kicad_sch
U4: library part DIP794W45P254L959H508Q8, Sheetfile=MC_SunSensorPCB.kicad_sch
U5: library part SOIC127P1030X265-24N, Sheetfile=MC_SunSensorPCB.kicad_sch
U6 U7 U8 U9: library part Op-Amp, Sheetfile=MC_SunSensorPCB.kicad_sch
U10 U11 U12 U13: library part Hirose_DF13-07P-1.25DS_1x07_P1.25mm_Horizontal, "Hirose DF13 through hole, DF13-07P-1.25DS, 7 Pins per row (https://www.hirose.com/product/en/products/DF13/DF13-4P-1.25DS%2820%29/), generated with kicad-footprint-generator", Sheetfile=MC_SunSensorPCB.kicad_sch
U14 U15: library part QFN24-3X3, "<h3>24-Pin QFN -  3.0 x 3.0 mm - No center pad</h3>\n<p><b>Note:</b> No center pad per \"Exposed Die Pad Precautions\" section of the <a href=\"http://www.digikey.com/Web%20Export/Supplier%20Content/invensense-1428/pdf/invensense-mems-handling.pdf\">InvenSense MEMS Handling application note</a>.</p>", Sheetfile=MC_SunSensorPCB.kicad_sch
U16: library part SON127P600X500X90-9N-D, "DFN Small Flag Package", Sheetfile=MC_SunSensorPCB.kicad_sch
Y1: library part Crystal_SMD_3225-4Pin_3.2x2.5mm, "SMD Crystal SERIES SMD3225/4 http://www.txccrystal.com/images/pdf/7m-accuracy.pdf, 3.2x2.5mm^2 package", Sheetfile=MC_SunSensorPCB.kicad_sch
Q1 Q2: Sheetfile=MC_SunSensorPCB.kicad_sch

## Via types
v1: diameter 0.7, hole 0.4, F.Cu to B.Cu, tented both sides, 140 vias
v2: diameter 0.6, hole 0.3, F.Cu to B.Cu, tented both sides, 34 vias

## Nets (pads, with @x,y where several pads share a name; then routed paths per layer and width w, separated by ;. In a path a pad name is that pad's centre, name@x,y a point inside that pad or via, vN(x,y) a via of type N, cw(c..) or ccw(c..) an arc to the next point about the centre after c; other vN are vias at no path point)
1.8V: C16.1 C37.1 C38.1 C39.1 C40.1 D2.2 Q1.1 Q2.1 R10.2 R24.2 TP2.1 U3.2 U14.8 U14.13 U15.8 U15.9 U15.13 | length 20.9
  F.Cu w0.127: U14.8@166.346,57.813 166.843,57.813 167.005,57.651 167.005,56.381 167.272,56.114 C39.1@167.894,56.114
  F.Cu w0.2: Q2.1@157.988,59.501 158.361,59.501 158.686,59.176 R24.2@159.385,59.176 160.465,59.176 v1(160.528,59.239) ; Q1.1@157.988,62.549 158.234,62.549 158.623,62.16 R10.2@159.321,62.16 ; R10.2@159.385,62.224 160.465,62.224 v1(160.528,62.287) ; v1(165.608,62.223) 165.621,62.21 C37.1@165.621,61.08 165.871,60.83 U14.13@165.871,59.965 ; v1(165.735,68.827) 165.739,68.823 C38.1@165.739,67.656 165.989,67.405 U15.13@165.989,66.414 ; U15.8@166.464,64.287 166.936,64.287 167.237,63.986 C40.1@167.885,63.986 ; U15.9@166.489,64.637 167.234,64.637 C40.1@167.885,63.986 ; v1(168.91,64.255) 168.641,63.986 C40.1@167.885,63.986
  F.Cu w0.254: C39.1@167.894,56.114 168.669,56.114 v1(168.91,55.873) ; U3.2@180.34,57.295 180.34,55.136 D2.2@180.365,55.111
  other v2: 178.816,65.271 180.086,65.271 179.324,66.033 180.594,66.033
5VUSB_CHG: J1.32 J2.12 | length 49.8
  B.Cu w0.254: J1.32@148.59,94.989 149.86,96.259 187.198,96.259 188.685,94.772 J2.12@188.685,86.251
+3.3VA: C11.1 C12.1 FB1.1 U1.13 | length 5.8
  F.Cu w0.254: FB1.1@134.575,75.492 134.588,75.48 C12.1@136.099,75.48 136.368,75.749 C11.1@137.369,75.749 137.397,75.721 137.877,75.721 138.131,75.975 U1.13@140.126,75.975 ; C11.1@137.369,75.876 C11.1@137.397,75.848
+3V3: C2.1 C3.1 C4.1 C5.1 C7.1 C8.1 C9.2 C14.1 D1.2 D3.2 FB1.2 FB2.1 J2.1 R11.2 R25.2 R27.1 R28.2 SW1.3 TP3.1 U1.1 U1.19 U1.32 U1.48 U1.64 U2.2 | length 28.8
  F.Cu w0.254: SW1.3@112.809,73.562 113.284,73.087 v1(113.284,71.875) ; U2.2@126.746,57.295 126.746,55.873 D1.2@127.508,55.111 ; v1(131.826,73.653) 132.103,73.93 C14.1@133.051,73.93 133.064,73.918 FB1.2@134.575,73.918 ; v2(136.144,82.543) 136.375,82.312 C2.1@137.242,82.312 137.455,82.099 C8.1@138.512,82.099 138.636,81.975 U1.1@140.126,81.975 ; v1@137.414,63.493 R28.2@137.414,64.253 ; v1(140.462,85.337) 140.498,85.373 C3.1@141.461,85.373 141.461,85.218 142.046,84.633 U1.64@142.046,83.895 ; v1(142.632,69.843) 142.929,70.14 C7.1@142.929,71.022 ; C7.1@142.802,71.022 143.046,71.266 U1.19@143.046,72.555 ; R27.1@147.574,64.888 148.31,64.888 v1(148.336,64.862) ; U1.32@149.546,72.555 149.546,71.926 150.168,71.304 C5.1@150.168,71.022 150.259,71.113 v1(151.13,71.113) ; FB2.1@151.06,64.763 v1(152.178,64.763) ; D3.2@151.091,60.172 v1(152.209,60.172) ; U1.48@151.466,81.975 152.259,81.975 152.835,82.551 C4.1@152.99,82.551 152.908,82.633 v1(152.908,83.559) ; v1(153.924,58.159) 153.988,58.223 R25.2@155.067,58.223 ; v1(153.924,61.207) 153.988,61.271 R11.2@155.067,61.271
  other v1: 137.287,63.366 124.206,65.271 125.222,65.271 126.238,65.271 123.698,66.033 124.714,66.033 125.73,66.033 126.746,66.033
+5V: C6.1 C15.1 C17.1 C22.1 C23.1 C24.1 J1.65 J2.2 TP4.1 U2.3 U3.3 U4.8 U5.24 U6.4 U7.4 U8.4 U9.4 | length 26.2
  F.Cu w0.254: v1(134.493,45.078) 134.398,44.983 C22.1@134.398,43.821 134.411,43.808 U7.4@136.525,43.808 ; U8.4@144.05,19.424 144.653,19.424 145.174,19.945 C23.1@146.177,19.945 v1(146.177,21.202) ; U5.24@149.792,25.774 v1(151.511,25.774) ; v1(162.941,42.538) 162.783,42.696 C17.1@162.783,43.795 164.897,43.795 U6.4@164.91,43.808 ; U9.4@172.625,19.424 173.4,20.199 C24.1@174.752,20.199 174.752,21.329 v1(174.879,21.456)
  In2.Cu w0.254: 170.18,87.877 170.18,90.925 170.18,91.179 J1.65@171.45,92.449 172.72,91.179 172.72,90.417 172.72,87.877
  other v1: 129.032,54.603 130.556,54.603 131.826,54.603 182.88,54.857 183.896,54.857 184.912,54.857 129.794,55.365 131.318,55.365 183.388,55.619 184.404,55.619
ADCS_GPIO_3V3_SYS1: J2.7 U1.26 | length 79.7
  F.Cu w0.254: U1.26@146.546,72.555 146.546,71.365 147.428,70.483 147.428,69.76 149.652,67.536 v1(150.622,67.536)
  B.Cu w0.254: v1@150.643,67.557 159.004,67.557 161.798,70.351 196.342,70.351 198.628,72.637 198.628,81.527 197.612,82.543 187.517,82.543 J2.7@186.145,81.171
ADCS_GPIO_3V3_SYS2: J2.8 U1.27 | length 72.2
  F.Cu w0.254: U1.27@147.046,72.555 147.046,71.507 147.882,70.671 147.882,69.948 149.395,68.435 v1(151.13,68.435)
  B.Cu w0.254: v1(151.13,68.435) 158.612,68.435 161.09,70.913 195.634,70.913 197.866,73.145 197.866,80.257 196.952,81.171 J2.8@188.685,81.171
ADCS_GPIO_3V3_SYS3: J2.9 U1.28 | length 75.8
  F.Cu w0.254: U1.28@147.546,72.555 147.546,71.649 148.336,70.859 148.336,70.136 149.137,69.335 v1(150.622,69.335) ; v1(197.104,75.431) v2(197.104,83.305)
  B.Cu w0.254: v1(150.622,69.335) 158.496,69.335 160.528,71.367 194.818,71.367 197.104,73.653 v1(197.104,75.431) ; J2.9@186.145,83.711 187.517,85.083 195.834,85.083 197.104,83.813 v2(197.104,83.305)
ADCS_GPIO_INT_OBC: J1.5 U1.33 | length 53.9
  F.Cu w0.254: U1.33@151.466,74.475 181.162,74.475 182.727,76.04 182.727,96.412 J1.5@181.61,97.529
ADCS_GPIO_MRAM_HOLD: R27.2 U1.24 U16.7 | length 10.1
  F.Cu w0.25: v2(146.536,66.033) 146.66,65.908 R27.2@147.447,65.908
  F.Cu w0.254: U16.7@144.455,66.033 v2(146.536,66.033) ; U1.24@145.546,72.555 145.546,70.592 145.555,70.592 146.116,70.031 146.116,70.022 146.483,69.655 146.492,69.655 146.536,69.611 v2(146.536,69.208)
  B.Cu w0.254: v2(146.536,66.033) 146.708,66.205 146.708,69.036 v2(146.536,69.208)
ADCS_GPIO_MRAM_WP: R28.1 U1.25 U16.3 | length 24.7
  F.Cu w0.25: v2(137.285,66.006) 137.414,65.877 R28.1@137.414,65.273 137.924,64.763 U16.3@138.755,64.763
  F.Cu w0.254: U1.25@146.046,72.555 146.046,70.979 v2(146.743,70.282)
  B.Cu w0.254: v2(137.285,66.006) 137.964,65.327 137.964,62.9 137.922,62.858 138.557,62.223 144.844,62.223 147.162,64.541 147.162,69.863 v2(146.743,70.282)
ADCS_GPIO_MTR_ENABLE: J1.42 U1.61 | length 16.8
  F.Cu w0.254: J1.42@135.89,94.989 137.16,93.719 141.478,93.719 142.24,92.957 142.24,89.401 143.546,88.095 U1.61@143.546,83.895
ADCS_GPIO_MTR_XCOIL_CTL: J1.44 U1.62 | length 18.3
  F.Cu w0.254: J1.44@133.35,94.989 134.62,93.719 134.62,91.941 135.382,91.179 138.938,91.179 139.7,90.417 139.7,89.401 140.716,88.385 142.614,88.385 143.046,87.953 U1.62@143.046,83.895
ADCS_GPIO_MTR_YCOIL_CTL: J1.45 U1.2 | length 26.9
  F.Cu w0.254: J1.45@130.81,97.529 129.54,96.259 129.54,86.861 130.556,85.845 137.825,85.845 141.433,82.237 141.433,81.782 141.126,81.475 U1.2@140.126,81.475
ADCS_GPIO_MTR_ZCOIL_CTL: J1.46 U1.3 | length 23
  F.Cu w0.254: J1.46@130.81,94.989 132.08,93.719 132.08,87.115 132.842,86.353 137.959,86.353 141.887,82.425 141.887,81.594 141.268,80.975 U1.3@140.126,80.975
ADCS_GPIO_RW1_DIR: J1.20 U1.38 | length 31.1
  F.Cu w0.254: U1.38@151.466,76.975 163.342,76.975 v1(164.084,77.717)
  B.Cu w0.254: J1.20@163.83,94.989 165.1,93.719 165.1,78.733 v1(164.084,77.717)
ADCS_GPIO_RW1_ENABLE: J1.16 U1.34 | length 38.5
  F.Cu w0.254: U1.34@151.466,74.975 168.962,74.975 170.18,76.193 170.18,93.719 J1.16@168.91,94.989
ADCS_GPIO_RW1_PWM_SET: J1.24 U1.42 | length 23.9
  F.Cu w0.254: U1.42@151.466,78.975 158.035,78.975 v1(158.907,79.846)
  B.Cu w0.254: J1.24@158.75,94.989 160.02,93.719 160.02,80.96 v1(158.907,79.846)
ADCS_GPIO_RW1_RAMP: J1.37 U1.51 | length 24.4
  F.Cu w0.254: J1.37@140.97,97.529 142.24,98.799 149.098,98.799 149.86,98.037 149.86,87.369 148.546,86.055 U1.51@148.546,83.895
ADCS_GPIO_RW2_DIR: J1.21 U1.39 | length 30.8
  F.Cu w0.254: U1.39@151.466,77.475 161.048,77.475 162.56,78.987 162.56,96.259 J1.21@161.29,97.529
ADCS_GPIO_RW2_ENABLE: J1.17 U1.35 | length 38
  F.Cu w0.254: U1.35@151.466,75.475 166.414,75.475 167.64,76.701 167.64,96.259 J1.17@166.37,97.529
ADCS_GPIO_RW2_PWM_SET: J1.25 U1.43 | length 24
  F.Cu w0.254: U1.43@151.466,79.475 156.444,79.475 157.48,80.511 157.48,96.259 J1.25@156.21,97.529
ADCS_GPIO_RW2_RAMP: J1.38 U1.52 | length 19.3
  F.Cu w0.254: J1.38@140.97,94.989 142.24,96.259 146.558,96.259 147.32,95.497 147.32,89.147 148.336,88.131 148.336,86.861 148.046,86.571 U1.52@148.046,83.895
ADCS_GPIO_RW3_DIR: J1.22 U1.40 | length 27.3
  F.Cu w0.254: U1.40@151.466,77.975 160.278,77.975 v1(161.29,78.987)
  B.Cu w0.254: v1(161.29,78.987) 162.56,80.257 162.56,93.719 J1.22@161.29,94.989
ADCS_GPIO_RW3_ENABLE: J1.18 U1.36 | length 34.7
  F.Cu w0.254: U1.36@151.466,75.975 165.898,75.975 v1(166.624,76.701)
  B.Cu w0.254: J1.18@166.37,94.989 167.64,93.719 167.64,77.717 v1(166.624,76.701)
ADCS_GPIO_RW3_PWM_SET: J1.26 U1.44 | length 20.6
  F.Cu w0.254: U1.44@151.466,79.975 155.928,79.975 v1(156.464,80.511)
  B.Cu w0.254: J1.26@156.21,94.989 157.48,93.719 157.48,81.527 v1(156.464,80.511)
ADCS_GPIO_RW3_RAMP: J1.39 U1.53 | length 24
  F.Cu w0.254: U1.53@147.546,83.895 147.546,87.595 v1(147.574,87.623)
  B.Cu w0.254: J1.39@138.43,97.529 139.7,98.799 146.558,98.799 147.32,98.037 147.32,89.147 147.574,88.893 v1(147.574,87.623)
ADCS_GPIO_RW4_DIR: J1.23 U1.41 | length 27.2
  F.Cu w0.254: U1.41@151.466,78.475 158.492,78.475 160.02,80.003 160.02,96.259 J1.23@158.75,97.529
ADCS_GPIO_RW4_ENABLE: J1.19 U1.37 | length 34.6
  F.Cu w0.254: U1.37@151.466,76.475 164.112,76.475 165.1,77.463 165.1,96.259 J1.19@163.83,97.529
ADCS_GPIO_RW4_PWM_SET: J1.27 U1.45 | length 20.4
  F.Cu w0.254: U1.45@151.466,80.475 153.888,80.475 154.94,81.527 154.94,96.259 J1.27@153.67,97.529
ADCS_GPIO_RW4_RAMP: J1.40 U1.54 | length 17.2
  F.Cu w0.254: v2(146.92,85.591) 147.046,85.465 U1.54@147.046,83.895
  B.Cu w0.254: J1.40@138.43,94.989 139.7,93.719 144.018,93.719 144.78,92.957 144.78,89.401 146.92,87.261 v2(146.92,85.591)
ADCS_PWM_MTR_XCOIL_CTL: J1.47 U1.4 | length 28.3
  F.Cu w0.254: J1.47@128.27,97.529 128.27,96.887 127,95.617 127,84.575 128.27,83.305 v2(132.08,83.305) ; v2(138.43,80.765) 138.72,80.475 U1.4@140.126,80.475
  B.Cu w0.254: v2(132.08,83.305) 134.112,83.305 135.636,81.781 137.414,81.781 v2(138.43,80.765)
ADCS_PWM_MTR_YCOIL_CTL: J1.48 U1.8 | length 66.5
  F.Cu w0.254: v2(120.904,77.501) 121.374,77.501 122.174,76.701 135.382,76.701 136.398,77.717 137.668,77.717 138.426,78.475 U1.8@140.126,78.475
  B.Cu w0.254: v2(120.904,77.501) 119.342,77.501 117.602,79.241 117.602,88.385 113.792,92.195 113.792,100.069 114.046,100.323 115.316,101.593 124.968,101.593 127,99.561 127,98.799 127,96.259 J1.48@128.27,94.989
ADCS_PWM_MTR_ZCOIL_CTL: J1.49 U1.9 | length 63
  F.Cu w0.254: v2(120.904,76.701) 119.634,76.701 117.602,78.733 117.602,88.385 113.792,92.195 113.792,100.069 115.316,101.593 124.968,101.593 125.73,100.831 J1.49@125.73,97.529 ; v2(138.684,77.717) 138.942,77.975 U1.9@140.126,77.975
  B.Cu w0.254: v2(120.904,76.701) 122.428,76.701 135.382,76.701 136.398,77.717 v2(138.684,77.717)
ADCS_SPI_MRAM_MISO: U1.22 U16.2 | length 14.1
  F.Cu w0.25: v2(137.414,66.795) 138.176,66.033 U16.2@138.755,66.033 U16.2@139.065,66.033
  F.Cu w0.254: U1.22@144.546,72.555 144.546,69.953 v2(144.845,69.654)
  B.Cu w0.25: v2(137.414,66.795) 137.414,67.557 138.557,68.7 143.891,68.7 v2(144.845,69.654)
ADCS_SPI_MRAM_MOSI: U1.23 U16.5 | length 11
  F.Cu w0.25: U16.5@144.455,63.493 145.288,63.493 146.448,64.653 v2(146.448,64.714)
  F.Cu w0.254: U1.23@145.046,72.555 145.046,70.339 145.73,69.655 v2(145.73,69.523)
  B.Cu w0.254: v2(145.73,69.523) 145.908,69.344 145.908,65.773 146.276,65.406 146.296,65.406 146.448,65.254 v2(146.448,64.714)
ADCS_SPI_MRAM_NSS: U1.20 U16.1 | length 10.5
  F.Cu w0.254: U16.1@138.755,67.303 138.176,67.303 137.922,67.557 137.922,67.938 139.065,69.081 142.911,69.081 143.546,69.716 U1.20@143.546,72.555